# Altium PCB SM_ME0005V2.6_20161210.PcbDoc (part 3 of 3)
Units mil, origin at the board's own origin, x right, y up, seen from the top; angles counter-clockwise.
Board outline 2285 x 3470 mil, 2 copper layers (Top Layer, Bottom Layer); 87 components, 70 nets, 269 pads, 297 vias.
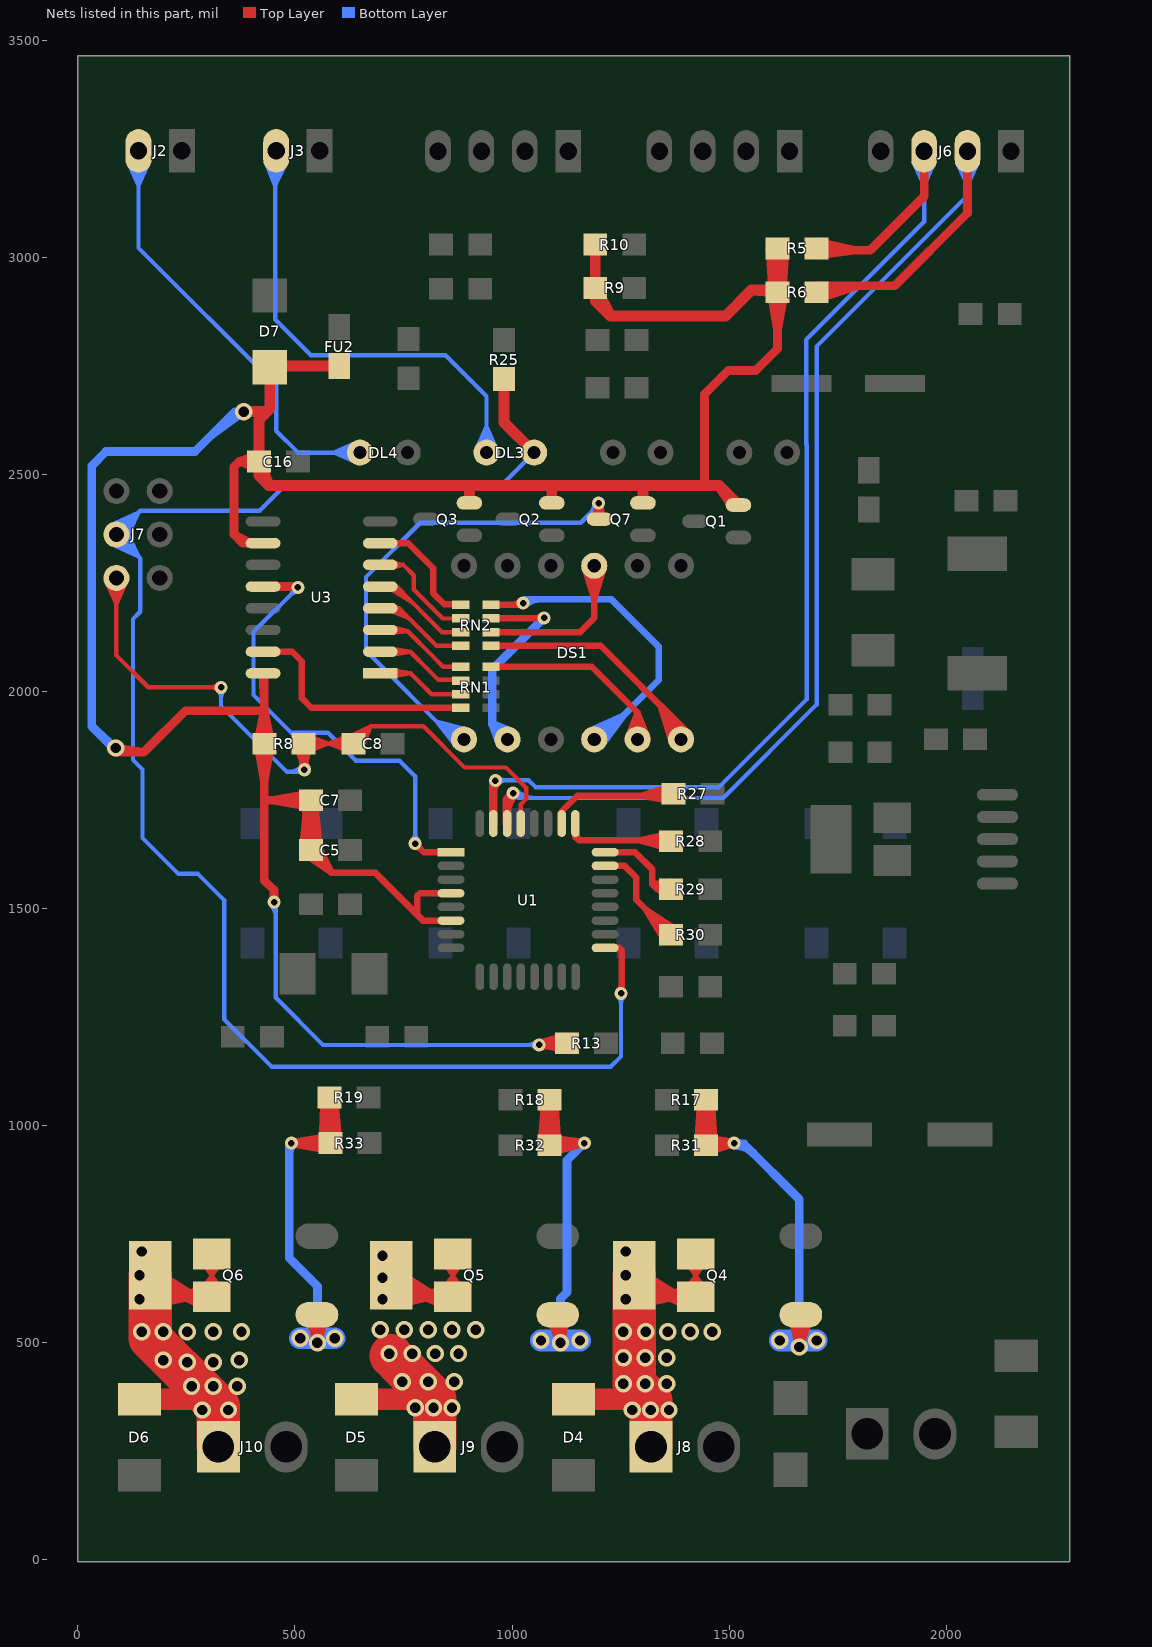
[diagram p3: the nets of this part, all layers, seen from the top]

## Via types
v1: diameter 40, hole 24, Top Layer to Bottom Layer, 247 vias
v2: diameter 30, hole 15, Top Layer to Bottom Layer, 50 vias

## Nets (pads, with @x,y where several pads share a name; then routed paths per layer and width w, separated by ;. In a path a pad name is that pad's centre, name@x,y a point inside that pad or via, vN(x,y) a via of type N, cw(c..) or ccw(c..) an arc to the next point about the centre after c; other vN are vias at no path point) (continued)
NetDS1_com4: DS1.com4 Q7.3 | length 1565.6
  Top Layer w10: v2@1199.73,2429.57 v2@1201.73,2427.57
  Top Layer w25: Q7.3@1199.73,2398.97 1199.73,2429.57 Q7.3@1201.73,2396.97
  Bottom Layer w10: DS1.com4@872.51,1871.21 826.48,1930.81 ; DS1.com4@880.06,1877.9 826.48,1930.81 ; DS1.com4@896.41,1902.87 826.48,1930.81 ; DS1.com4@899.52,1912.46 826.48,1930.81 ; 1180.13,2410.39 ccw(c1156.96,2433.57) v2@1189.73,2433.57 ; 1188.76,2419.02 cw(c1199.73,2408.05) v2@1199.73,2423.57 ; v2@1199.73,2429.57 1199.31,2429.57 1158.31,2388.57 788.73,2388.57 663.73,2263.57 663.73,2093.57 867.73,1889.57 DS1.com4@889.49,1889.57 826.48,1930.81
  other v2: 1199.73,2433.57
NetDS1_d: DS1.d RN1.2 | length 620.1
  Top Layer w15: RN1.2@951.73,2056.57 1183.73,2056.57 1289.49,1950.81 ; RN1.2@961.89,2056.57 1016.73,2056.57 ; DS1.d@1267.37,1893.7 1289.49,1950.81 ; DS1.d@1289.49,1889.57 1289.49,1950.81 ; DS1.d@1311.61,1893.7 1289.49,1950.81
NetDS1_dp: DS1.dp RN2.2 | length 1131.1
  Top Layer w15: RN2.2@951.73,2199.57 1021.73,2199.57 v2(1025.73,2203.57) ; RN2.2@961.89,2199.57 v2@1016.73,2199.57 ; 997.97,2199.57 ccw(c997.97,2231.33) 1020.43,2208.87 cw(c997.97,2231.33) 997.97,2199.57
  Bottom Layer w10: DS1.dp@1189.49,1889.57 DS1.dp@1189.49,1901.81
  Bottom Layer w15: v2@1027.73,2209.57 1030.23,2212.07 1229.23,2212.07 1337.73,2103.57 1337.73,2025.57 1213.98,1901.81 1201.73,1901.81 DS1.dp@1189.49,1889.57 1257.28,1945.11 ; v2@1031.04,2198.26 cw(c1064.36,2164.94) 1064.36,2212.07 ; DS1.dp@1177.58,1908.66 1257.28,1945.11 ; DS1.dp@1205.86,1874.14 1257.28,1945.11
NetDS1_e: DS1.e RN2.8 | length 1024
  Top Layer w15: RN2.8@951.73,2105.08 1204.22,2105.08 1389.49,1919.81 ; RN2.8@961.89,2105.08 1016.73,2105.08 ; DS1.e@1368.99,1880.3 1342.01,1967.29 ; DS1.e@1407.09,1903.58 1342.01,1967.29 ; 1342.01,1967.29 DS1.e@1389.49,1889.57 ; DS1.e@1389.49,1889.57 1389.49,1919.81 ; DS1.e@1389.49,1889.57 1389.49,1919.81 ; 1389.49,1919.81 1410.37,1897.94 1389.49,1919.81 ; 1389.49,1919.81 1368.6,1897.94 1389.49,1919.81
NetDS1_f: DS1.f RN2.6 | length 576.4
  Top Layer w15: RN2.6@951.73,2136.57 1156.74,2136.57 1189.49,2169.32 DS1.f@1189.49,2289.57 ; RN2.6@961.89,2136.57 1016.73,2136.57 ; DS1.f@1167.24,2286.19 1189.49,2214.57 DS1.f@1211.73,2286.19
NetDS1_g: DS1.g RN2.4 | length 626.6
  Top Layer w15: RN2.4@951.73,2168.07 v2@1063.24,2168.07 ; RN2.4@961.89,2168.07 1016.73,2168.07 ; 1052.01,2168.07 ccw(c1052.01,2191.28) v2@1068.43,2174.87
  Bottom Layer w20: DS1.g@972.76,1878.6 954.73,1924.32 ; DS1.g@989.49,1889.57 954.73,1924.32 ; DS1.g@1000.46,1906.29 954.73,1924.32 ; v2(1073.73,2169.57) 954.73,2050.57 954.73,1924.32
NetQ4_1: Q4.1 R17.2 R31.2 | length 2287.6
  Top Layer w20: R31.2@1429.23,954.28 R17.2@1435.1,1039.7 ; R31.2@1431.79,955.89 R17.2@1446.73,1039.57 ; R17.2@1431.79,1058.24 1446.73,974.57 R17.2@1461.67,1058.24 ; R31.2@1434.51,957.47 R17.2@1458.36,1039.7 ; R31.2@1444.23,954.57 R17.2@1435.1,1039.7 ; R31.2@1446.73,954.57 R17.2@1446.73,1039.57 ; R17.2@1446.73,1059.57 1446.73,959.57 v2(1511.73,959.57) ; R31.2@1449.83,969.55 v2(1511.73,959.57) ; R31.2@1452.21,939.86 v2(1511.73,959.57) ; R31.2@1458.95,957.47 R17.2@1435.1,1039.7 ; R31.2@1461.67,955.89 R17.2@1446.73,1039.57 ; R31.2@1464.23,954.28 R17.2@1458.36,1039.7 ; Q4.1@1646.09,562.45 v1(1661.73,489.57) ; Q4.1@1684.75,560.47 v1(1661.73,489.57) ; R17.2@1458.36,1039.7 1449.23,954.57 v2(1511.73,959.57) ; v1(1661.73,489.57) Q4.1@1665.55,564.01 1664.52,565.04 1662.81,565.04 1661.73,563.97 v1(1661.73,489.57)
  Bottom Layer w20: v2@1511.73,954.57 cw(c1511.73,892.97) 1555.28,936.53 ; v2(1511.73,959.57) 1513.98,957.32 1534.49,957.32 1661.73,830.08 1661.73,504.57 v1(1661.73,489.57) ; v2@1515.27,963.1 ccw(c1529.22,977.05) 1529.22,957.32
  Bottom Layer w50: v1(1616.73,504.57) 1661.73,504.57 v1(1701.73,504.57)
NetQ5_1: Q5.1 R18.2 R32.2 | length 2583.8
  Top Layer w10: Q5.1@1105.49,564.01 Q5.1@1105.55,564.01
  Top Layer w20: R32.2@1069.23,954.28 R18.2@1075.1,1039.7 ; R32.2@1071.79,955.89 R18.2@1086.73,1039.57 ; R18.2@1071.79,1058.24 1086.73,974.57 R18.2@1101.67,1058.24 ; R32.2@1074.51,957.47 R18.2@1098.36,1039.7 ; R32.2@1084.23,954.57 R18.2@1075.1,1039.7 ; Q5.1@1086.62,559.24 v1(1111.73,499.57) ; R32.2@1086.73,954.57 R18.2@1086.73,1039.57 ; R18.2@1086.73,1059.57 R32.2@1086.73,959.57 ; R32.2@1098.95,957.47 R18.2@1075.1,1039.7 ; R32.2@1101.67,955.89 R18.2@1086.73,1039.57 ; R32.2@1104.23,954.28 R18.2@1098.36,1039.7 ; Q5.1@1125.05,562.93 v1(1111.73,499.57) ; R32.2@1086.73,959.57 v2(1166.73,959.57) ; R32.2@1086.73,959.57 v2(1166.73,959.57) ; R32.2@1089.23,954.57 v2(1166.73,959.57) ; R32.2@1089.23,954.57 v2(1166.73,959.57) ; R32.2@1089.23,954.57 R18.2@1098.36,1039.7 ; v1(1111.73,499.57) Q5.1@1105.55,564.01 1111.73,557.83 v1(1111.73,499.57) ; v2(1166.73,959.57) 1091.64,939.76 v2(1166.73,959.57) ; v2(1166.73,959.57) 1089.72,969.56 v2(1166.73,959.57)
  Bottom Layer w20: v1@1111.73,504.57 1111.73,600.82 1126.73,615.82 1126.73,919.57 v2(1166.73,959.57)
  Bottom Layer w50: v1@1111.73,504.57 v1(1066.73,504.57) v1@1111.73,504.57 ; v1@1111.73,504.57 v1(1156.73,504.57) v1@1111.73,504.57
NetQ6_1: Q6.1 R19.2 R33.2 | length 2655.1
  Top Layer w10: R33.2@579.49,961.81 R33.2@581.73,959.57
  Top Layer w20: v2(491.73,959.57) R33.2@576.73,959.57 ; Q6.1@531.31,560.7 v1(551.73,499.57) ; R33.2@564.25,958.9 R19.2@568,1043.9 ; R19.2@564.55,1063.24 R33.2@579.49,979.57 ; R33.2@569.45,962.09 R19.2@591.32,1045.81 ; Q6.1@569.9,561.41 v1(551.73,499.57) ; R33.2@577.91,944.62 v2@494.23,959.57 ; R33.2@577.91,974.51 v2@494.23,959.57 ; R33.2@579.49,961.81 R19.2@579.49,1069.57 ; R19.2@579.49,1064.57 R33.2@579.49,979.57 ; R33.2@584.23,959.57 R19.2@591.32,1045.81 ; R33.2@593.87,962.85 R19.2@568,1043.9 ; R19.2@594.43,1063.24 R33.2@579.49,979.57 ; R33.2@599.23,959.64 R19.2@591.32,1045.81 ; v2@494.23,959.57 579.23,959.57 R19.2@568,1043.9 ; v1(551.73,499.57) Q6.1@550.55,564.01 551.73,562.83 v1(551.73,499.57) ; R19.2@579.49,1044.63 R33.2@581.73,959.57 R19.2@579.49,1044.85 ; R19.2@579.49,1044.63 596.63,961.28 R19.2@579.49,1044.85 ; R19.2@579.49,1044.63 566.76,960.49 R19.2@579.49,1044.85
  Bottom Layer w20: 486.73,935.42 cw(c515.87,935.42) v2@495.27,956.03 ; v2@486.73,954.57 486.73,694.57 551.73,629.57 551.73,509.57 v1(551.73,499.57)
  Bottom Layer w50: v1@551.73,509.57 v1(511.73,509.57) v1@551.73,509.57 ; v1@551.73,509.57 v1(591.73,509.57) v1@551.73,509.57
NetR27_2: R27.2 U1.26 | length 514.2
  Top Layer w15: U1.26@1114.51,1695.61 1114.51,1723.94 1150.13,1759.57 1366.73,1759.57 R27.2@1371.73,1764.57 ; R27.2@1365.84,1781.73 1298.81,1759.57 ; R27.2@1368.3,1747.09 1298.81,1759.57 ; R27.2@1369.23,1764.57 1298.81,1759.57
NetR28_2: R28.2 U1.25 | length 1022.2
  Top Layer w10: U1.25@1146.01,1695.61 1146.01,1664.57 ; R28.2@1351.73,1654.57 1156.01,1654.57 ; R28.2@1360.6,1634.9 1309.23,1654.57 ; R28.2@1360.6,1674.23 1309.23,1654.57 ; R28.2@1363.32,1644.61 1309.23,1654.57 ; R28.2@1363.32,1664.52 1309.23,1654.57 ; R28.2@1364.23,1654.57 1309.23,1654.57 ; 1146.01,1664.57 U1.25@1146.01,1674.46 ; 1146.01,1664.57 U1.25@1146.01,1674.46 ; 1146.01,1664.57 1156.01,1654.57 ; U1.25@1146.01,1674.46 1156.01,1654.57
  Top Layer w15: R28.2@1361.47,1637.29 1294.15,1656.91 ; R28.2@1362.63,1671.99 1294.15,1656.91 ; R28.2@1364.23,1654.57 1294.15,1656.91 ; R28.2@1366.73,1654.57 1364.39,1656.91 1153.67,1656.91 ; 1153.67,1656.91 1146.01,1674.46 1146.01,1664.57 1153.67,1656.91
NetR29_2: R29.2 U1.24 | length 555.9
  Top Layer w15: U1.24@1214.49,1629.57 1283.49,1629.57 ; U1.24@1235.65,1629.57 1283.49,1629.57 ; R29.2@1356.02,1529.11 1323.49,1556.32 ; R29.2@1365.51,1562.02 1323.49,1556.32 ; R29.2@1366.73,1544.57 1335.24,1544.57 ; 1283.49,1629.57 1323.49,1589.57 1323.49,1556.32 ; 1323.49,1556.32 R29.2@1364.23,1544.57 ; 1323.49,1556.32 1335.24,1544.57 ; 1335.24,1544.57 R29.2@1364.23,1544.57 ; 1335.24,1544.57 1358.95,1561.25 1335.24,1544.57 ; 1335.24,1544.57 1358.95,1527.88 1335.24,1544.57 ; 1335.24,1544.57 R29.2@1364.23,1544.57
NetR30_2: R30.2@1366.73,1439.57 U1.23 | length 507.6
  Top Layer w15: U1.23@1214.49,1598.07 1259.49,1598.07 ; U1.23@1235.65,1598.07 1259.49,1598.07 ; R30.2@1350.32,1428.96 1309.91,1496.39 ; R30.2@1364.23,1439.57 1309.91,1496.39 ; R30.2@1366.73,1439.57 1286.49,1519.81 1286.49,1571.07 1259.49,1598.07 ; R30.2@1375.46,1452.99 1309.91,1496.39
NetRN1_1: RN1.1 U3.3 | length 356.4
  Top Layer w10: U3.3@696.49,2141.57 699.49,2138.57 759.73,2138.57 ; U3.3@724.49,2141.57 759.73,2138.57 ; U3.3@724.59,2134.57 759.73,2138.57 ; U3.3@725.77,2148.45 759.73,2138.57 ; RN1.1@871.57,2056.57 841.73,2056.57 ; RN1.1@881.73,2056.57 841.73,2056.57 ; 759.73,2138.57 816.73,2081.57 841.73,2056.57
NetRN1_3: RN1.3 U3.2 | length 376.4
  Top Layer w10: U3.2@696.49,2091.57 765.73,2091.57 ; U3.2@724.49,2091.57 765.73,2091.57 ; U3.2@725.08,2084.59 765.73,2091.57 ; U3.2@725.08,2098.54 765.73,2091.57 ; 831.71,2026.57 RN1.3@871.57,2025.07 ; RN1.3@881.73,2025.07 880.24,2026.57 830.73,2026.57 807.73,2049.57 765.73,2091.57
NetRN1_5: RN1.5 U3.1 | length 371
  Top Layer w10: U3.1@696.49,2041.57 766.73,2041.57 804.73,2003.57 814.72,1993.57 RN1.5@881.73,1993.57 ; U3.1@724.49,2041.57 766.49,2041.57 ; U3.1@725.07,2034.59 766.49,2041.57 ; U3.1@725.07,2048.54 766.49,2041.57 ; 831.73,1993.57 RN1.5@871.57,1993.57
NetRN1_7: RN1.7 U3.15 | length 652.8
  Top Layer w10: 537.73,1962.57 538.22,1962.08
  Top Layer w15: U3.15@426.49,2091.57 493.73,2091.57 ; U3.15@454.49,2091.57 493.73,2091.57 ; 537.73,1962.57 515.73,1984.57 515.73,2069.57 493.73,2091.57 ; 538.22,1962.08 RN1.7@881.73,1962.08 ; 816.73,1962.08 RN1.7@871.57,1962.08
NetRN2_1: RN2.1 U3.7 | length 353
  Top Layer w15: U3.7@696.49,2341.57 760.73,2341.57 ; U3.7@724.49,2341.57 760.73,2341.57 ; 818.55,2242.75 818.55,2253.57 ; RN2.1@871.57,2199.57 843.73,2200.57 ; RN2.1@881.73,2199.57 880.73,2200.57 843.73,2200.57 ; 760.73,2341.57 818.55,2283.75 818.55,2253.57 ; 818.55,2253.57 818.55,2225.75 843.73,2200.57
NetRN2_3: RN2.3 U3.6 | length 362.8
  Top Layer w10: U3.6@696.49,2291.57 749.73,2291.57 ; U3.6@724.49,2291.57 749.73,2291.57 ; U3.6@725.46,2284.63 749.73,2291.57 ; U3.6@725.46,2298.5 749.73,2291.57 ; RN2.3@871.57,2168.07 840.23,2168.07 ; RN2.3@881.73,2168.07 840.23,2168.07 ; 749.73,2291.57 773.73,2267.57 773.73,2234.57 840.23,2168.07
NetRN2_5: RN2.5 U3.5 | length 455.8
  Top Layer w10: U3.5@696.49,2241.57 733.73,2241.57 838.73,2136.57 ; U3.5@720.42,2235.87 772.04,2203.26 ; U3.5@724.49,2241.57 772.04,2203.26 ; U3.5@729.18,2246.76 772.04,2203.26 ; RN2.5@871.57,2136.57 838.73,2136.57 ; RN2.5@892.73,2136.57 838.73,2136.57
NetRN2_7: RN2.7 U3.4 | length 488.3
  Top Layer w10: U3.4@696.49,2191.57 739.73,2191.57 ; U3.4@721.33,2185.32 763.24,2168.06 ; U3.4@728.57,2197.25 763.24,2168.06 ; 831.73,2105.08 RN2.7@871.57,2105.08 ; RN2.7@881.73,2105.08 826.22,2105.08 739.73,2191.57 ; U3.4@724.49,2191.57 739.73,2191.57 ; U3.4@724.49,2191.57 763.24,2168.06 ; U3.4@724.49,2191.57 739.73,2191.57 ; 739.73,2191.57 726.1,2184.75 739.73,2191.57 ; 739.73,2191.57 726.1,2198.38 739.73,2191.57
OUT1: D4.A J8.1 Q4.2 | length 4491.2
  Top Layer w10: D4.A@1141.73,369.57 D4.A@1175.49,369.57 ; Q4.2@1280.05,600.88 Q4.2@1393.03,605.35 ; Q4.2@1280.1,610.92 Q4.2@1393.03,605.35 ; Q4.2@1280.9,590.84 Q4.2@1393.03,605.35 ; Q4.2@1281.69,625.04 Q4.2@1393.03,605.35 ; Q4.2@1281.69,654.57 1330.9,605.35 Q4.2@1423.42,605.35 1423.42,653.57 ; Q4.2@1282.66,580.84 Q4.2@1393.03,605.35 ; Q4.2@1285.04,638.85 Q4.2@1393.03,605.35 ; J8.1@1285.49,259.57 J8.1@1320.25,259.57 ; Q4.2@1288.44,648.29 Q4.2@1393.03,605.35 ; Q4.2@1292.68,657.44 Q4.2@1393.03,605.35 ; Q4.2@1297.75,666.23 Q4.2@1393.03,605.35 ; Q4.2@1394.42,694.56 1423.43,653.57 ; Q4.2@1394.55,614.96 1423.42,653.57 ; Q4.2@1403.45,609.68 1423.42,653.57 ; Q4.2@1403.42,699.62 1423.43,653.57 ; Q4.2@1408.47,575.76 1350.12,605.35 ; Q4.2@1408.47,634.95 1350.12,605.35 ; Q4.2@1412.36,585.17 1350.12,605.35 ; Q4.2@1412.36,625.54 1350.12,605.35 ; Q4.2@1413.05,606.48 1423.42,653.57 ; Q4.2@1413.05,702.69 1423.43,653.57 ; Q4.2@1414.72,594.95 1350.12,605.35 ; Q4.2@1414.72,615.75 1350.12,605.35 ; Q4.2@1415.55,605.35 1350.12,605.35 ; Q4.2@1423.43,703.78 1423.43,653.57 ; Q4.2@1433.8,606.48 1423.42,653.57 ; Q4.2@1433.8,702.69 1423.43,653.57 ; Q4.2@1443.39,609.68 1423.42,653.57 ; Q4.2@1443.43,699.62 1423.43,653.57 ; Q4.2@1452.3,614.96 1423.42,653.57 ; Q4.2@1452.43,694.56 1423.43,653.57
  Top Layer w25: 1316.65,369.57 1320.25,365.97
  Top Layer w50: 1256.73,369.57 1154.23,369.57 1316.65,369.57 ; 1256.73,369.57 1276.73,369.57 1306.73,369.57 1316.65,369.57 ; 1256.73,369.57 D4.A@1141.73,369.57 1316.65,369.57
  Top Layer w100: 1281.69,404.57 1281.69,464.57 1281.69,524.57 ; 1281.69,404.53 1281.69,625.04 1281.69,524.57 ; 1281.69,404.53 1294.19,392.03 1309.19,377.03 1316.65,369.57 1281.69,404.53 ; 1281.69,404.53 Q4.2@1281.69,654.57 1281.69,599.57 1281.69,524.57 ; J8.1@1320.25,269.41 v1@1320.25,344.57 ; J8.1@1320.25,269.41 v1@1320.25,344.57 ; J8.1@1320.25,269.41 1320.25,365.97 ; J8.1@1320.25,269.41 1320.25,365.97 ; v1@1320.25,344.57 J8.1@1320.25,259.57 1320.25,365.97 ; v1@1320.25,344.57 1320.25,365.97
  other v1: 1276.73,344.57 1319.23,344.57 1361.73,344.57 1256.73,404.57 1306.73,404.57 1356.73,404.57 1256.73,464.57 1306.73,464.57 1356.73,464.57 1256.73,524.57 1307.98,524.57 1359.23,524.57 1410.48,524.57 1461.73,524.57 1261.73,599.57 1261.73,654.57 1261.73,709.57
OUT2: D5.A J9.1 Q5.2 | length 3900
  Top Layer w10: D5.A@641.73,369.57 D5.A@676.49,369.57 ; Q5.2@720.05,600.88 Q5.2@833.03,605.35 ; Q5.2@720.1,610.92 Q5.2@833.03,605.35 ; Q5.2@720.9,590.84 Q5.2@833.03,605.35 ; 721.69,449.53 v1@721.69,469.61 ; Q5.2@721.69,625.04 Q5.2@833.03,605.35 ; Q5.2@721.69,654.57 770.9,605.35 Q5.2@863.42,605.35 863.42,653.57 ; Q5.2@722.66,580.84 Q5.2@833.03,605.35 ; Q5.2@725.04,638.85 Q5.2@833.03,605.35 ; Q5.2@728.44,648.29 Q5.2@833.03,605.35 ; Q5.2@732.68,657.44 Q5.2@833.03,605.35 ; Q5.2@737.75,666.23 Q5.2@833.03,605.35 ; J9.1@786.49,259.57 J9.1@821.92,259.57 ; Q5.2@834.42,694.56 863.43,653.57 ; Q5.2@834.55,614.96 863.42,653.57 ; Q5.2@843.45,609.68 863.42,653.57 ; Q5.2@843.42,699.62 863.43,653.57 ; Q5.2@848.47,575.76 790.12,605.35 ; Q5.2@848.47,634.95 790.12,605.35 ; Q5.2@852.36,585.17 790.12,605.35 ; Q5.2@852.36,625.54 790.12,605.35 ; Q5.2@853.05,606.48 863.42,653.57 ; Q5.2@853.05,702.69 863.43,653.57 ; Q5.2@854.72,594.95 790.12,605.35 ; Q5.2@854.72,615.75 790.12,605.35 ; Q5.2@855.55,605.35 790.12,605.35 ; Q5.2@863.43,703.78 863.43,653.57 ; Q5.2@873.8,606.48 863.42,653.57 ; Q5.2@873.8,702.69 863.43,653.57 ; Q5.2@883.39,609.68 863.42,653.57 ; Q5.2@883.43,699.62 863.43,653.57 ; Q5.2@892.3,614.96 863.42,653.57 ; Q5.2@892.43,694.56 863.43,653.57
  Top Layer w50: 821.92,369.38 821.73,369.57 ; 746.73,369.57 654.23,369.57 821.73,369.57 ; 746.73,369.57 D5.A@641.73,369.57 821.73,369.57 ; 746.73,369.57 776.73,369.57 806.73,369.57 819.23,369.57 821.73,369.57
  Top Layer w100: J9.1@821.92,269.41 v1@821.92,349.57 ; J9.1@821.92,269.41 v1@821.92,349.57 ; J9.1@821.92,269.41 821.92,369.38 ; J9.1@821.92,269.41 821.92,369.38 ; v1@821.92,349.57 J9.1@821.92,259.57 821.92,369.38 ; v1@821.92,349.57 821.92,369.38 ; v1@721.69,469.61 743.4,447.9 764.23,427.07 794.23,397.07 809.23,382.07 821.73,369.57 v1@721.69,469.61
  other v1: 776.73,349.57 819.23,349.57 861.73,349.57 746.73,409.57 806.73,409.57 866.73,409.57 716.73,474.57 770.07,474.57 823.4,474.57 876.73,474.57 696.73,529.57 751.73,529.57 806.73,529.57 861.73,529.57 916.73,529.57 701.73,599.57 701.73,649.57 701.73,699.57
OUT3: D6.A J10.1 Q6.2 | length 4441.3
  Top Layer w10: D6.A@141.73,369.57 D6.A@177.49,369.57 ; Q6.2@165.05,600.88 Q6.2@278.03,605.35 ; Q6.2@165.1,610.92 Q6.2@278.03,605.35 ; Q6.2@165.9,590.84 Q6.2@278.03,605.35 ; Q6.2@166.69,625.04 Q6.2@278.03,605.35 ; Q6.2@166.69,654.57 215.9,605.35 Q6.2@308.42,605.35 308.42,653.57 ; Q6.2@167.66,580.84 Q6.2@278.03,605.35 ; Q6.2@170.04,638.85 Q6.2@278.03,605.35 ; Q6.2@173.44,648.29 Q6.2@278.03,605.35 ; Q6.2@177.68,657.44 Q6.2@278.03,605.35 ; Q6.2@182.75,666.23 Q6.2@278.03,605.35 ; Q6.2@279.42,694.56 308.43,653.57 ; Q6.2@279.55,614.96 308.42,653.57 ; J10.1@287.49,259.57 J10.1@323.58,259.57 ; Q6.2@288.45,609.68 308.42,653.57 ; Q6.2@288.42,699.62 308.43,653.57 ; Q6.2@293.47,575.76 235.12,605.35 ; Q6.2@293.47,634.95 235.12,605.35 ; Q6.2@297.36,585.17 235.12,605.35 ; Q6.2@297.36,625.54 235.12,605.35 ; Q6.2@298.05,606.48 308.42,653.57 ; Q6.2@298.05,702.69 308.43,653.57 ; Q6.2@299.72,594.95 235.12,605.35 ; Q6.2@299.72,615.75 235.12,605.35 ; Q6.2@300.55,605.35 235.12,605.35 ; Q6.2@308.43,703.78 308.43,653.57 ; Q6.2@318.8,606.48 308.42,653.57 ; Q6.2@318.8,702.69 308.43,653.57 ; Q6.2@328.39,609.68 308.42,653.57 ; Q6.2@328.43,699.62 308.43,653.57 ; Q6.2@337.3,614.96 308.42,653.57 ; Q6.2@337.43,694.56 308.43,653.57
  Top Layer w25: 306.73,369.57 309.23,367.07 323.58,352.72 306.73,369.57
  Top Layer w50: 261.73,369.57 154.23,369.57 306.73,369.57 ; 261.73,369.57 D6.A@141.73,369.57 306.73,369.57 ; 261.73,369.57 286.73,369.57 306.73,369.57
  Top Layer w100: 166.69,509.61 166.69,625.04 v1@166.69,524.57 ; 166.69,509.61 174.23,502.07 206.73,469.57 236.73,439.57 266.73,409.57 269.23,407.07 294.23,382.07 306.73,369.57 166.69,509.61 ; 166.69,509.61 v1@166.69,524.57 ; 166.69,509.61 Q6.2@166.69,654.57 166.69,599.57 v1@166.69,524.57 ; J10.1@323.58,269.41 323.58,344.57 ; J10.1@323.58,269.41 323.58,352.72 ; J10.1@323.58,269.41 323.58,344.57 ; J10.1@323.58,269.41 323.58,352.72 ; 323.58,344.57 323.58,352.72 ; 323.58,344.57 J10.1@323.58,259.57 323.58,352.72
  other v1: 286.73,344.57 346.73,344.57 261.73,399.57 311.73,399.57 366.73,399.57 251.73,454.57 311.73,454.57 196.73,459.57 371.73,459.57 146.73,524.57 196.73,524.57 251.73,524.57 311.73,524.57 376.73,524.57 141.73,599.57 141.73,654.57 146.73,709.57
RESET: C8.2 J7.5 R8.2 U1.29 | length 3151.9
  Top Layer w10: J7.5@64.04,2256.36 88.49,2201.57 ; J7.5@73.61,2259.69 88.49,2201.57 ; J7.5@103.37,2259.69 88.49,2201.57 ; J7.5@112.94,2256.36 88.49,2201.57 ; v2@322.66,2002.49 ccw(c305.59,1985.42) 305.59,2009.57 ccw(c305.59,2033.71) v2@322.66,2016.64 ; v2(329.73,2009.57) 161.73,2009.57 88.49,2082.81 J7.5@88.49,2261.57 88.49,2201.57 ; R8.2@499.82,1875.93 v2@519.49,1824.57 ; R8.2@509.53,1878.66 v2@519.49,1824.57 ; 512.55,1842.7 ccw(c536.07,1851.7) v2@525.81,1828.7 ; v2@512.6,1823.64 ccw(c491.51,1833.05) 513.08,1841.31 ; v2@513.5,1825.24 ccw(c497.28,1836.42) 516.65,1839.98 ; v2@514.66,1826.64 ccw(c503.01,1838.29) 519.49,1838.29 ; 515.51,1846.16 ccw(c543.63,1851.34) v2@527.41,1827.8 ; v2@516.06,1827.8 ccw(c508.39,1838.93) 521.68,1836.48 ; v2@517.66,1828.7 ccw(c513.22,1838.64) 523.39,1834.74 ; 519.49,1849.13 ccw(c551.29,1849.13) v2@528.8,1826.64 ; v2(521.73,1819.57) 519.49,1821.81 R8.2@519.49,1879.57 C8.2@634.49,1879.57 674.49,1919.57 ; R8.2@521.99,1879.57 576.99,1879.57 ; R8.2@522.9,1869.61 576.99,1879.57 ; R8.2@522.9,1889.52 576.99,1879.57 ; 524.4,1851.26 ccw(c558.6,1844.97) v2@529.97,1825.24 ; R8.2@525.62,1859.9 576.99,1879.57 ; R8.2@525.62,1899.23 576.99,1879.57 ; R8.2@529.45,1878.66 v2@519.49,1824.57 ; 530.09,1852.26 ccw(c565.02,1838.88) v2@530.86,1823.64 ; R8.2@539.15,1875.93 v2@519.49,1824.57 ; C8.2@625.14,1895.68 674.49,1919.57 ; C8.2@628.35,1859.9 576.99,1879.57 ; C8.2@628.35,1899.23 576.99,1879.57 ; C8.2@630.35,1887.04 674.49,1919.57 ; C8.2@631.08,1869.61 576.99,1879.57 ; C8.2@631.08,1889.52 576.99,1879.57 ; C8.2@631.99,1879.57 576.99,1879.57 ; C8.2@636.99,1879.57 674.49,1919.57 ; C8.2@644.88,1873.42 674.49,1919.57 ; C8.2@653.83,1868.78 674.49,1919.57 ; U1.29@1020.02,1695.61 1020.02,1739.68 ; U1.29@1020.02,1716.77 1020.02,1739.68 ; 674.49,1919.57 795.85,1919.57 890.85,1824.57 985.91,1824.57 1032.49,1777.99 1032.49,1752.14 1020.02,1739.68
  Bottom Layer w10: v2@322.66,2002.49 cw(c305.59,1985.42) 329.73,1985.42 cw(c353.87,1985.42) v2@336.8,2002.49 ; v2(329.73,2009.57) 329.73,1966.57 481.73,1814.57 516.73,1814.57 v2(521.73,1819.57) ; 485.52,1814.57 ccw(c485.52,1855.78) v2@514.66,1826.64
RX: J6.2 R6.1 U1.30 | length 3694.5
  Top Layer w10: R6.1@1686.73,2919.57 1691.73,2924.57 R6.1@1701.73,2924.57
  Top Layer w20: U1.30@988.53,1695.61 988.53,1751.61 ; U1.30@988.53,1716.77 988.53,1751.61 ; v2(1002.49,1765.57) 988.53,1751.61 ; R6.1@1701.73,2919.57 1716.73,2934.57 1881.73,2934.57 2049.49,3102.32 J6.2@2049.49,3244.57 ; R6.1@1702.99,2934.51 1794.56,2934.57 ; R6.1@1704.23,2919.57 1794.56,2934.57 ; R6.1@1707.89,2905.02 1794.56,2934.57 ; U1.30@988.53,1719.79 cw(c1048.26,1719.79) 1006.02,1762.03 ccw(c1048.26,1719.79) U1.30@988.53,1719.79 ; 988.53,1745.82 cw(c1003.29,1745.82) 1002.69,1760.57 ccw(c1003.29,1745.82) 988.53,1745.82
  Bottom Layer w10: v2@1009.56,1772.64 ccw(c1053.19,1816.26) 1053.19,1754.57 ; 1029.04,1754.57 cw(c1029.04,1792.12) v2(1002.49,1765.57) 1013.49,1754.57 1486.73,1754.57 1701.73,1969.57 1701.73,2794.57 2049.49,3142.32 J6.2@2049.49,3244.57 ; J6.2@2025.49,3219.83 2049.49,3165.35 ; J6.2@2035.07,3223.11 2049.49,3165.35 ; J6.2@2049.49,3224.88 2049.49,3165.35 ; J6.2@2063.91,3223.11 2049.49,3165.35 ; J6.2@2073.49,3219.83 2049.49,3165.35
SCK: DL3.A J7.3 R25.1 U1.17 | length 4649.5
  Top Layer w10: v2(1251.2,1304.57) 1252.83,1304.57 v2@1254.49,1306.23
  Top Layer w15: U1.17@1214.49,1409.09 1247.2,1409.09 ; U1.17@1235.65,1409.09 1247.2,1409.09 ; U1.17@1235.65,1409.09 1247.2,1409.09 ; U1.17@1235.65,1409.09 1252.83,1403.47 ; 1247.2,1409.09 1252.83,1403.47 ; 1252.83,1403.47 1252.83,1304.57 1252.83,1403.47 ; v2@1245.89,1309.87 ccw(c1229.15,1326.61) 1252.83,1326.61 cw(c1229.15,1326.61) v2@1245.89,1309.87
  Top Layer w25: R25.1@981.73,2717.07 981.73,2619.53 ; R25.1@981.73,2719.57 981.73,2619.53 ; DL3.A@1051.06,2550.2 981.73,2619.53
  Bottom Layer w10: J7.3@74.13,2341.1 139.7,2310.35 ; J7.3@74.13,2382.03 139.7,2412.78 ; J7.3@79.04,2349.92 139.7,2310.35 ; J7.3@79.04,2373.21 139.7,2412.78 ; J7.3@100.14,2352.11 139.7,2412.78 ; J7.3@100.14,2371.02 139.7,2310.35 ; J7.3@108.95,2347.2 139.7,2412.78 ; J7.3@108.95,2375.93 139.7,2310.35 ; DL3.A@1051.06,2550.2 971.65,2470.78 472.95,2470.78 418.73,2416.57 143.49,2416.57 J7.3@88.49,2361.57 143.49,2306.57 143.49,2183.75 126.73,2166.99 126.73,1842.28 148.73,1820.28 148.73,1662.57 231.73,1579.57 276.73,1579.57 336.73,1519.57 336.73,1244.57 445.73,1135.57 1227.73,1135.57 1251.2,1159.03 v2(1251.2,1304.57) ; v2@1244.12,1297.49 cw(c1227.05,1280.42) 1251.2,1280.42 cw(c1275.34,1280.42) v2@1258.27,1297.49
ST_CP: U1.1 U3.12 | length 1290
  Top Layer w15: v2@776.73,1642.07 cw(c776.73,1623.96) 789.54,1636.76 cw(c802.34,1649.57) v2@784.23,1649.57 ; v2(776.73,1649.57) 796.73,1629.57 ; U1.1@838.33,1629.57 796.73,1629.57 ; U1.1@859.49,1629.57 796.73,1629.57
  Top Layer w20: U3.12@426.49,2241.57 504.73,2241.57 U3.12@454.49,2241.57 ; 489.83,2241.57 cw(c489.83,2222.67) 503.2,2236.03 ccw(c489.83,2222.67) 489.83,2241.57
  Bottom Layer w10: v2@496.73,2239.57 cw(c472.59,2239.57) 489.66,2222.49 cw(c506.73,2205.42) v2@506.73,2229.57 ; v2(506.73,2239.57) 404.49,2137.32 404.49,1991.81 491.15,1905.15 575.45,1905.15 640.39,1840.22 741.08,1840.22 776.73,1804.57 v2(776.73,1649.57) ; v2@769.66,1656.64 ccw(c752.59,1673.71) 776.73,1673.71 ccw(c800.87,1673.71) v2@783.8,1656.64
SW1_IN: DL3.K J3.2 | length 2326
  Bottom Layer w10: DL3.K@916.61,2555.4 941.06,2610.2 ; DL3.K@926.18,2552.07 941.06,2610.2 ; DL3.K@941.06,2550.2 941.06,2680.23 846.73,2774.57 536.73,2774.57 454.49,2856.81 ; DL3.K@955.95,2552.07 941.06,2610.2 ; DL3.K@965.52,2555.4 941.06,2610.2 ; 454.49,2856.81 454.49,3245.57 454.49,3254.57 454.49,2856.81 ; 454.49,3165.53 456.73,3225.57 454.49,3165.53 ; 454.49,3165.53 441.79,3224.25 454.49,3165.53 ; 454.49,3165.53 471.53,3223.14 454.49,3165.53 ; 454.49,3165.53 432.1,3221.28 454.49,3165.53 ; 454.49,3165.53 480.97,3219.45 454.49,3165.53
SW2_IN: DL4.K J2.2 | length 1599.5
  Bottom Layer w10: J2.2@115.04,3220.36 139.49,3165.57 ; J2.2@124.61,3223.69 139.49,3165.57 ; J2.2@139.49,3225.57 139.49,3165.57 ; J2.2@139.49,3254.57 139.49,3021.81 456.73,2704.57 456.73,2600.2 506.73,2550.2 DL4.K@649.72,2550.2 589.72,2550.2 ; J2.2@154.37,3223.69 139.49,3165.57 ; J2.2@163.94,3220.36 139.49,3165.57 ; DL4.K@644.52,2525.74 589.72,2550.2 ; DL4.K@644.52,2574.65 589.72,2550.2 ; DL4.K@647.85,2535.31 589.72,2550.2 ; DL4.K@647.85,2565.08 589.72,2550.2
TX: J6.3 R5.1 U1.31 | length 3407.7
  Top Layer w10: U1.31@957.03,1695.61 U1.31@961.73,1700.31 ; R5.1@1686.73,3039.57 1701.73,3039.57 R5.1@1686.73,3039.57
  Top Layer w20: U1.31@957.03,1695.61 957.03,1789.87 v2(961.73,1794.57) ; U1.31@957.03,1716.77 v2@957.03,1786.61 ; R5.1@1704.23,3020.57 1790.2,3016.57 ; R5.1@1704.84,3005.58 1790.2,3016.57 ; R5.1@1706.23,3035.43 1790.2,3016.57 ; R5.1@1724.73,3016.57 1825.45,3016.57 1949.49,3140.61 J6.3@1949.49,3244.57 ; 957.03,1771.15 cw(c985.15,1771.15) 965.27,1791.03 ccw(c985.15,1771.15) 957.03,1771.15
  Bottom Layer w10: v2@962.73,1795.57 1038.31,1795.57 1054.31,1779.57 1476.73,1779.57 1678.74,1981.57 1678.74,2568.84 1677.73,2569.84 1677.73,2810.57 1949.49,3082.32 J6.3@1949.49,3244.57 ; v2@968.8,1787.49 cw(c988.29,1768.01) 988.29,1795.57 ; v2@968.8,1801.64 ccw(c983.46,1816.29) 983.46,1795.57 ; J6.3@1925.49,3219.83 1949.49,3165.35 ; J6.3@1935.07,3223.11 1949.49,3165.35 ; J6.3@1949.49,3224.88 1949.49,3165.35 ; J6.3@1963.91,3223.11 1949.49,3165.35 ; J6.3@1973.49,3219.83 1949.49,3165.35
VCC: C5.2 C7.2 C16.2 D7.2 FU2.2 Q1.2 Q2.2 Q3.2 Q7.2 R5.2 R6.2 R8.1 R9.2 R10.2 R13.2 U1.4 U1.6 U3.10 U3.16 | length 11463.6
  Top Layer w15: C5.2@527.5,1621.58 583.73,1582.57 ; C5.2@536.73,1629.57 583.73,1582.57 ; C5.2@539.23,1634.57 583.73,1582.57 ; C5.2@553.87,1644.15 583.73,1582.57 ; 781.73,1489.57 781.73,1529.57 787.24,1535.08 ; U1.6@838.33,1472.09 794.9,1472.09 ; U1.4@838.33,1535.08 787.24,1535.08 ; U1.6@859.49,1472.09 794.9,1472.09 ; U1.4@859.49,1535.08 787.24,1535.08 ; 583.73,1582.57 684.42,1582.57 794.9,1472.09
  Top Layer w20: v1@86.73,1859.57 151.73,1859.57 ; v1(86.73,1869.57) 151.73,1859.57 ; C16.2@411.58,2514.8 371.73,2529.57 ; C16.2@411.58,2544.33 371.73,2529.57 ; C16.2@414.23,2529.57 371.73,2529.57 ; R8.1@414.55,1878.24 429.49,1794.57 R8.1@444.43,1878.24 ; R8.1@414.56,1881.05 429.49,1955.57 ; C16.2@416.73,2529.57 371.73,2529.57 ; U3.10@426.49,2341.57 379.49,2341.57 ; 429.49,1969.2 U3.16@426.49,2041.57 429.49,2038.57 429.49,1955.57 ; R8.1@444.41,1881.05 429.49,1955.57 ; v2(451.73,1514.57) 451.73,1542.32 429.49,1564.57 429.49,1754.57 ; C5.2@519.23,1634.58 526.82,1720.09 ; C5.2@521.79,1635.89 536.73,1719.57 C5.2@551.67,1635.89 ; C7.2@521.79,1748.24 536.73,1664.57 ; C5.2@524.46,1637.16 546.65,1720.09 ; C7.2@532.91,1734.62 449.23,1749.57 ; C7.2@532.91,1764.51 449.23,1749.57 ; C5.2@534.23,1634.57 526.82,1720.09 ; C7.2@534.23,1749.57 449.23,1749.57 ; C5.2@536.73,1629.57 C5.2@536.73,1634.57 ; C5.2@539.23,1634.57 546.65,1720.09 ; C5.2@549.01,1637.16 526.82,1720.09 ; C7.2@551.67,1748.24 536.73,1664.57 ; C5.2@554.23,1634.58 546.65,1720.09 ; v2(1062.73,1185.57) v2@1066.73,1189.57 ; v2@1065.23,1181.24 cw(c1079.64,1156.3) 1087.08,1184.12 ; v2@1067.06,1183.07 cw(c1085.88,1172.2) 1080.26,1193.19 ; R13.2@1122.28,1174.69 v2@1066.73,1189.57 ; R13.2@1122.28,1204.44 v2@1066.73,1189.57 ; R13.2@1124.23,1189.57 v2@1066.73,1189.57 ; R13.2@1126.73,1189.57 v2@1066.73,1189.57 ; 1443.49,2479.32 1443.49,2684.57 1498.49,2739.57 1561.73,2739.57 1611.73,2789.57 R6.2@1611.73,2919.57 ; R5.2@1594.24,3020.97 R6.2@1599.47,2935.9 ; R6.2@1596.79,2918.24 1611.73,2834.57 ; R6.2@1596.79,2920.89 1611.73,3004.57 R6.2@1626.67,2920.89 ; R5.2@1596.79,3019.24 R6.2@1611.73,2935.57 ; R5.2@1599.54,3017.54 R6.2@1623.99,2935.9 ; R5.2@1609.23,3020.57 R6.2@1599.47,2935.9 ; R5.2@1614.23,3020.57 R6.2@1623.99,2935.9 ; R5.2@1623.92,3017.54 R6.2@1599.47,2935.9 ; R6.2@1626.67,2918.24 1611.73,2834.57 ; R5.2@1626.67,3019.24 R6.2@1611.73,2935.57 ; R5.2@1629.23,3020.97 R6.2@1623.99,2935.9 ; 151.73,1859.57 247.73,1955.57 429.49,1955.57 ; 359.49,2361.57 U3.10@398.49,2341.57 ; 359.49,2361.57 359.49,2517.32 371.73,2529.57 ; 359.49,2361.57 379.49,2341.57 ; 379.49,2341.57 U3.10@398.49,2341.57 ; 379.49,2341.57 U3.10@398.49,2341.57 ; 429.49,1754.57 R8.1@429.49,1879.57 429.49,1955.57 ; 429.49,1754.57 434.49,1749.57 C7.2@536.73,1749.57 C5.2@536.73,1634.57 ; C5.2@536.73,1634.57 536.73,1664.57 ; C5.2@536.73,1634.57 536.73,1664.57 ; 536.73,1664.57 551.26,1638.32 536.73,1664.57 ; 536.73,1664.57 522.21,1638.32 536.73,1664.57 ; 1611.73,2834.57 R6.2@1611.73,2919.57 ; R6.2@1611.73,2919.57 R5.2@1611.73,3020.57 R6.2@1611.73,2935.57 ; v2@1066.27,1182.03 cw(c1084.46,1163.84) 1084.46,1189.57 ccw(c1084.46,1163.84) v2@1066.27,1182.03
  Top Layer w25: v1(381.73,2644.57) 435.73,2644.57 ; C16.2@419.23,2529.57 439.49,2474.57 ; 501.73,2749.57 FU2.2@601.73,2749.57 444.41,2749.57 D7.2@441.73,2746.89 441.73,2650.57 435.73,2644.57 ; Q3.2@901.73,2434.37 901.73,2469.57 896.73,2474.57 ; Q2.2@1091.73,2434.37 1091.73,2474.57 ; R9.2@1194.23,2929.57 1226.73,2864.57 ; Q7.2@1301.73,2434.37 1301.73,2469.57 1306.73,2474.57 ; Q1.2@1507.95,2429.37 1476.54,2474.57 ; Q1.2@1521.73,2429.37 1476.54,2474.57 ; R6.2@1609.23,2919.57 1551.73,2924.57 ; R6.2@1611.73,2919.57 1606.73,2924.57 1551.73,2924.57 ; 416.73,2497.32 C16.2@416.73,2529.57 ; 416.73,2497.32 C16.2@416.73,2529.57 ; 416.73,2497.32 439.49,2474.57 ; 416.73,2497.32 C16.2@416.73,2529.57 ; C16.2@416.73,2529.57 416.73,2625.57 435.73,2644.57 ; 439.49,2474.57 896.73,2474.57 ; 896.73,2474.57 1091.73,2474.57 ; 1091.73,2474.57 1306.73,2474.57 ; 1191.73,2899.57 R9.2@1191.73,2929.57 ; 1191.73,2899.57 R9.2@1191.73,2929.57 ; 1191.73,2899.57 1226.73,2864.57 ; 1191.73,2899.57 R9.2@1191.73,2929.57 ; R9.2@1191.73,2929.57 R10.2@1191.73,3029.57 R9.2@1191.73,2929.57 ; 1226.73,2864.57 1491.73,2864.57 1551.73,2924.57 ; 1306.73,2474.57 1476.54,2474.57
  Bottom Layer w10: v2@444.66,1507.49 cw(c418.52,1481.36) 455.49,1481.36 ; v2(451.73,1514.57) 455.49,1510.81 455.49,1294.57 564.49,1185.57 v2(1062.73,1185.57) 1065.73,1188.57 v2@1065.73,1195.57 ; 455.49,1499.49 cw(c466.81,1499.49) v2@458.8,1507.49 ; v2@1055.66,1178.49 ccw(c1038.59,1161.42) 1038.59,1185.57 ccw(c1038.59,1209.71) v2@1055.66,1192.64
  Bottom Layer w20: v1@84.23,1867.07 31.73,1919.57 ; v1(86.73,1869.57) 31.73,1919.57 ; 307.69,2590.52 v1(381.73,2644.57) 361.73,2644.57 269.73,2552.57 64.73,2552.57 31.73,2519.57 31.73,1919.57
pads on no net: U3.9

## Polygon pours and split planes (outlines as drawn)
GND on Top Layer "TopLayer-No Net" (solid, remove dead copper, pour order 58): 576.73,1817.57 737.73,1817.57 737.73,1612.87 736.54,1610.57 576.73,1610.57 576.73,1817.57
GND on Top Layer "TopLayer-No Net" (solid, remove dead copper, pour order 52): 155.73,2511.03 353.73,2511.03 353.73,2033.03 155.73,2033.03 155.73,2511.03
+24V on Top Layer "TopLayer-No Net" (solid, remove dead copper, pour order 59): 1943.42,364.57 1916.73,339.57 1916.73,-5.43 2311.73,-5.43 2311.73,359.57 2306.39,364.57 1943.42,364.57
NetQ4_1 on Top Layer "TopLayer-No Net" (solid, remove dead copper, pour order 93): 1620.23,598.57 1591.23,568.77 1591.23,479.37 1620.23,449.57 1707.23,449.57 1736.23,479.37 1736.23,568.77 1707.23,598.57 1620.23,598.57
NetQ5_1 on Top Layer "TopLayer-No Net" (solid, remove dead copper, pour order 91): 1065.23,598.57 1036.23,568.77 1036.23,479.37 1065.23,449.57 1152.23,449.57 1181.23,479.37 1181.23,568.77 1152.23,598.57 1065.23,598.57
NetQ6_1 on Top Layer "TopLayer-No Net" (solid, remove dead copper, pour order 89): 505.23,593.57 476.23,563.77 476.23,474.37 505.23,444.57 592.23,444.57 621.23,474.37 621.23,563.77 592.23,593.57 505.23,593.57
GND1 on Top Layer "TopLayer-No Net" (solid, remove dead copper, pour order 87): 1586.73,899.57 1736.73,899.57 1736.73,674.57 1731.73,669.57 1586.73,669.57 1586.73,899.57
GND1 on Top Layer "TopLayer-No Net" (solid, remove dead copper, pour order 84): 1036.73,899.57 1186.73,899.57 1186.73,674.57 1181.73,669.57 1036.73,669.57 1036.73,899.57
GND1 on Top Layer "TopLayer-No Net" (solid, remove dead copper, pour order 82): 476.73,909.57 626.73,909.57 626.73,674.78 621.73,669.57 476.73,669.57 476.73,909.57
GND1 on Top Layer "TopLayer-No Net" (solid, remove dead copper, pour order 80): 301.73,914.57 1966.73,914.57 1966.73,774.57 323.22,774.57 301.73,790.57 301.73,914.57
OUT1 on Top Layer "TopLayer-No Net" (solid, remove dead copper, pour order 78): 1231.73,744.57 1501.73,744.57 1501.73,479.57 1231.73,479.57 1231.73,744.57
OUT2 on Top Layer "TopLayer-No Net" (solid, remove dead copper, pour order 76): 671.73,747.57 966.73,747.57 966.73,479.57 671.73,479.57 671.73,747.57
OUT3 on Top Layer "TopLayer-No Net" (solid, remove dead copper, pour order 74): 116.73,748.57 421.73,748.57 421.73,489.57 116.73,489.57 116.73,748.57
GND on Top Layer "TopLayer-No Net" (solid, remove dead copper, pour order 54): 1761.73,2359.57 1906.54,2359.57 1906.54,2179.57 1761.73,2179.57 1761.73,2359.57
OUT3 on Top Layer "TopLayer-No Net" (solid, remove dead copper, pour order 55): 251.73,619.57 386.73,619.57 386.73,189.57 251.73,189.57 251.73,619.57
OUT2 on Top Layer "TopLayer-No Net" (solid, remove dead copper, pour order 60): 761.73,479.57 886.73,479.57 886.73,189.57 761.73,189.57 761.73,479.57
OUT1 on Top Layer "TopLayer-No Net" (solid, remove dead copper, pour order 64): 1261.73,482.07 1376.73,482.07 1376.73,189.57 1261.73,189.57
+24V on Top Layer "TopLayer-No Net" (solid, remove dead copper, pour order 67): 16.73,129.57 2021.73,129.57 2021.73,-5.43 22.63,-5.43 16.73,-1.46 16.73,129.57
GND1 on Top Layer "TopLayer-No Net" (solid, remove dead copper, pour order 69): 1751.73,484.57 1886.73,484.57 1886.73,214.57 1756.39,214.57 1751.73,223.57 1751.73,484.57
GND1 on Top Layer "TopLayer-No Net" (solid, remove dead copper, pour order 75): 8.77,1616.57 425.73,1616.57 425.73,774.57 8.77,774.57 8.77,1616.57
GND1 on Top Layer "TopLayer-No Net" (solid, remove dead copper, pour order 85): 86.14,434.57 96.73,442.8 96.73,504.57 6.73,504.57 6.73,446.92 22.61,434.57 86.14,434.57
GND1 on Top Layer "TopLayer-No Net" (solid, remove dead copper, pour order 56): 14.78,774.57 15.69,775.57 97,775.57 97,505.37 97.73,504.57 14.78,504.57 14.78,774.57
GND on Top Layer "TopLayer-No Net" (solid, remove dead copper, pour order 57): 1548.15,2524.66 1646.73,2524.66 1646.73,1163.57 1549.35,1163.57 1549.35,2523.69
GND on Top Layer "TopLayer-No Net" (solid, remove dead copper, pour order 61): 1440.73,1344.57 1637.73,1344.57 1637.73,1163.57 1440.73,1163.57 1440.73,1344.57
GND on Top Layer "TopLayer-No Net" (solid, remove dead copper, pour order 41): 0,3464.57 0,2054.57 2283.46,2054.57 2283.46,3464.57 -0.51,3464.57
GND1 on Top Layer "TopLayer-No Net" (solid, remove dead copper, pour order 43): 2279.07,1999.57 1614.07,1999.57 1614.07,199.57 1614.07,194.57 2305.8,194.57 2305.8,1999.57 2305.8,1994.57 1658.98,1994.57
GND on Bottom Layer "TopLayer-No Net" (solid, remove dead copper, pour order 73): 620.73,1826.57 782.73,1826.57 782.73,1296.57 620.73,1296.57 620.73,1826.57
GND on Bottom Layer "TopLayer-No Net" (solid, remove dead copper, pour order 70): 617.73,1370.57 1041.73,1370.57 1041.73,1206.57 617.73,1206.57 617.73,1370.57
GND on Bottom Layer "TopLayer-No Net" (solid, remove dead copper, pour order 68): 461.71,1815.59 712.71,1815.59 712.71,1741.59 461.71,1741.59 461.71,1815.59
GND on Bottom Layer "TopLayer-No Net" (solid, remove dead copper, pour order 65): 260.04,1898.57 499.04,1898.57 499.04,1740.57 262.19,1740.57 262.19,1894.98 260.04,1898.57
GND on Bottom Layer "TopLayer-No Net" (solid, remove dead copper, pour order 62): 162.15,2269.95 281.4,2269.95 281.4,1785.69 281.77,1784.68 161.77,1784.68 161.77,2268.93 162.15,2269.95
GND1 on Bottom Layer "TopLayer-No Net" (solid, remove dead copper, pour order 102): -18.05,1620.2 2279.1,1620.2 2279.1,0 -18.05,0 -18.05,1620.2
GND on Bottom Layer "TopLayer-No Net" (solid, remove dead copper, pour order 101): -52.31,3512.32 2389.07,3512.32 2389.07,2055.33 -52.31,2055.33 -52.31,3512.32
+24V on Bottom Layer "TopLayer-No Net" (solid, remove dead copper, pour order 86): 1916.73,364.57 2286.73,364.57 2286.73,-5.43 1916.73,-5.43 1916.73,354.57
+24V on Bottom Layer "TopLayer-No Net" (solid, remove dead copper, pour order 88): 16.73,139.57 2286.73,139.57 2286.73,-5.43 22.79,-5.43 16.73,-0.43 16.73,139.57
OUT3 on Bottom Layer "TopLayer-No Net" (solid, remove dead copper, pour order 90): 116.73,739.57 116.73,489.57 251.73,354.57 251.73,199.57 266.73,184.57 366.73,184.57 381.73,184.57 391.73,194.57 391.73,324.57 391.73,479.57 396.73,484.57 411.73,484.57 421.73,494.57 431.73,504.57 431.73,739.57 116.73,739.57
OUT2 on Bottom Layer "TopLayer-No Net" (solid, remove dead copper, pour order 92): 686.73,744.57 661.73,719.57 661.73,714.57 661.73,464.57 751.73,374.57 751.73,369.57 751.73,194.57 766.73,179.57 781.73,179.57 871.73,179.57 886.73,194.57 886.73,199.57 886.73,454.57 891.73,459.57 956.73,524.57 956.73,529.57 956.73,714.57 931.73,739.57 931.73,744.57 686.73,744.57
OUT1 on Bottom Layer "TopLayer-No Net" (solid, remove dead copper, pour order 94): 1256.73,739.57 1231.73,714.57 1231.73,394.57 1256.73,369.57 1256.73,204.57 1256.73,194.57 1266.73,184.57 1271.73,179.57 1366.73,179.57 1371.73,179.57 1381.73,189.57 1381.73,459.57 1416.73,494.57 1491.73,494.57 1496.73,494.57 1511.73,509.57 1516.73,514.57 1516.73,719.57 1496.73,739.57 1256.73,739.57
GND1 on Bottom Layer "TopLayer-No Net" (solid, remove dead copper, pour order 96): 1751.73,439.57 1880.27,439.57 1884.05,431.9 1884.05,247.9 1865.15,209.57 1789.54,209.57 1770.64,209.57 1751.73,247.9 1751.73,439.57
GND1 on Bottom Layer "TopLayer-No Net" (solid, remove dead copper, pour order 39): 1727.22,2009.57 1727.22,1620.2 1728.09,1620.2 2257.97,1620.2 2257.97,2009.57 1727.22,2009.57

## Keep-outs
Keep-Out Layer:
  lines w10: -0.51,0 -0.51,3464.57 ; 0,-65.43 0,-45.43 ; 0,0 2283.46,0 2283.46,3464.57 0,3464.57 ; 60,-75.43 0,-55.43 ; 60,-35.43 0,-55.43 ; 957.02,-55.43 0,-55.43 ; 1326.44,-55.43 2283.46,-55.43 ; 2223.46,-75.43 2283.46,-55.43 ; 2223.46,-35.43 2283.46,-55.43 ; 2283.46,-65.43 2283.46,-45.43 ; 2347.46,60 2367.46,0 ; 2347.46,3404.57 2367.46,3464.57 ; 2357.46,0 2377.46,0 ; 2357.46,3464.57 2377.46,3464.57 ; 2367.46,1547.92 2367.46,0 ; 2367.46,1916.64 2367.46,3464.57 ; 2387.46,60 2367.46,0 ; 2387.46,3404.57 2367.46,3464.57
  text "3464.567 (mil)" at 2397.65,1557.92 h60 r90
  text "2283.465 (mil)" at 967.02,-85.62 h60

## Silkscreen, mask and mechanical layers (free items; w line width, h text height)
Top Overlay:
  lines w10: 31.73,2004.57 364.49,2004.57 ; 31.73,2094.57 364.49,2094.57 ; 204.49,1929.57 204.49,2169.57 ; 31.73,1924.57 364.49,1924.57 364.49,2169.57 31.73,2169.57 31.73,1924.57
  text "GND A2 A1 GND" at 781.73,3369.57 h60
  text "5V SDA SCL GND" at 1289.49,3369.57 h60
  text "5V TX RX GND" at 1839.49,3369.57 h60
  text "SW1 GND" at 89.49,3365.57 h60
  text "SW2 GND" at 404.49,3365.57 h60
  text "MISO    5V" at 56.73,2114.57 h60
  text "SCK   MOSI" at 66.73,2029.57 h60
  text "RSET   GND" at 51.73,1939.57 h60
  text "OUT--24V" at 31.73,929.57 h98.43 r270
  text "+24V" at 1881.73,589.57 h98.43
  text "-  +" at 1774.49,-5.43 h196.85
  text "-    +" at 251.73,-10.43 h150
  text "-    +" at 751.73,-10.43 h150
  text "-    +" at 1251.73,-10.43 h150
Bottom Overlay:
  lines w10: 401.73,1558.07 1881.73,1558.07 ; 486.73,2090.16 1791.73,2090.16 ; 492.13,1520.57 492.13,1596.57 ; 925.2,1520.57 925.2,1597.57 ; 1141.73,1469.57 1141.73,2305.57 ; 1358.27,1518.07 1358.27,1594.57 ; 1791.34,1518.07 1791.34,1597.57
  text "2016-12-10  V2.6" at 1506.73,789.57 h120
Top Solder:
  lines w110: 551.73,754.57 551.73,794.57 586.73,829.57 ; 586.73,839.57 1780.43,839.57 ; 1106.73,754.57 1106.73,839.57 ; 1666.73,754.57 1666.73,839.57 ; 1780.43,829.57 1818.58,791.42 1818.58,289.57

## Text inside footprints (layer, text, board x,y; h text height)
C6: Top Overlay "+" at 2006.52,1090.5 h78.74 r180
C15: Top Overlay "+" at 1683.68,2624.38 h59.06
Q4: Top Overlay "3" at 1517.91,711.65 h43.31 r90; Top Overlay "1" at 1517.91,575.83 h43.31 r90
Q5: Top Overlay "3" at 957.91,711.65 h43.31 r90; Top Overlay "1" at 957.91,575.83 h43.31 r90
Q6: Top Overlay "3" at 402.91,711.65 h43.31 r90; Top Overlay "1" at 402.91,575.83 h43.31 r90
U2: Top Overlay "1" at 1970.94,1580.83 h43.31 r90; Top Overlay "5" at 1970.94,1716.65 h43.31 r90